# Altium PCB wifi_car.PcbDoc (part 5 of 5)
Units mm, origin at the board's own origin, x right, y up, seen from the top; angles counter-clockwise.
Board outline 68.55 x 80.89 mm, 2 copper layers (Top Layer, Bottom Layer); 133 components, 98 nets, 473 pads, 106 vias.
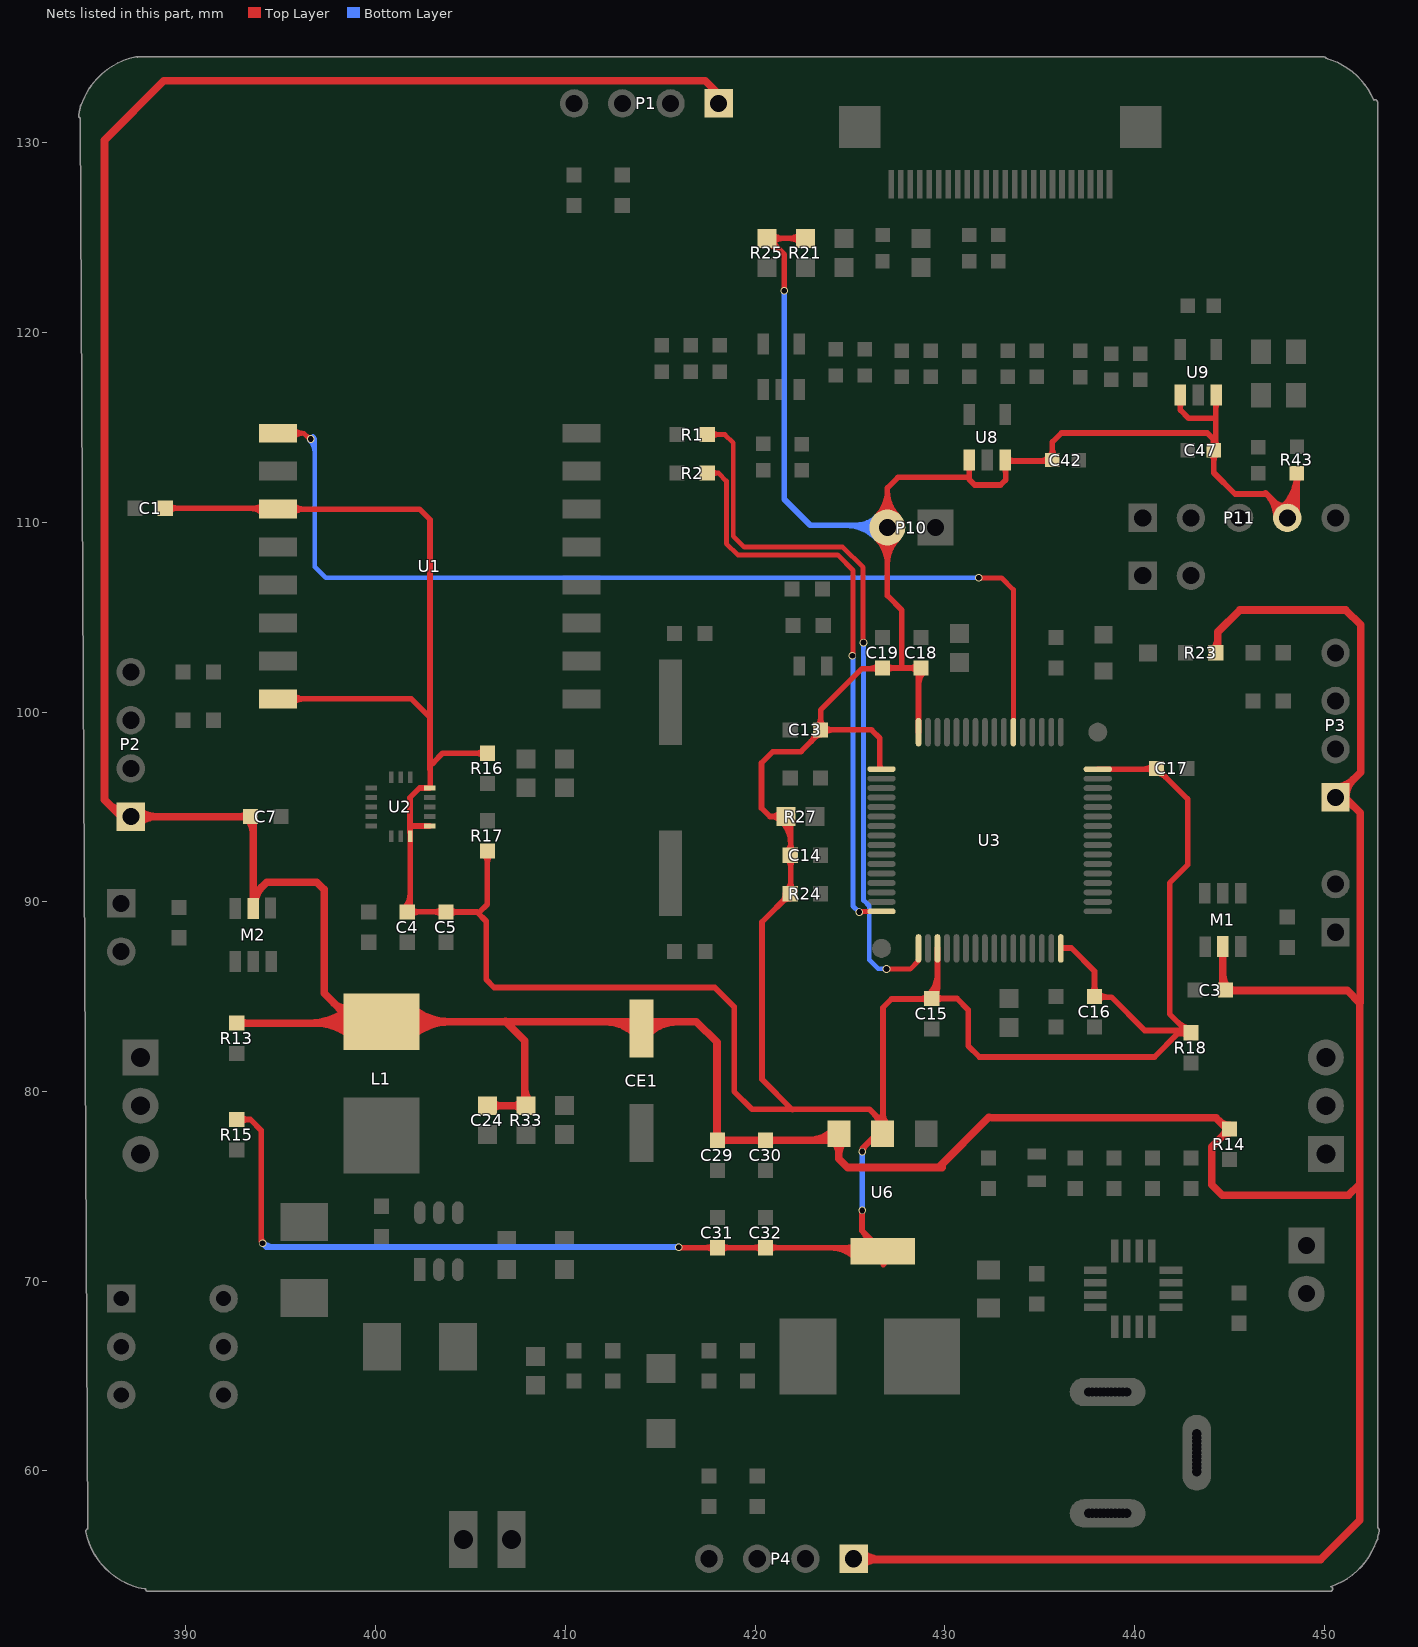
[diagram p5: the nets of this part, all layers, seen from the top]

## Via types
v1: diameter 0.4, hole 0.3, Top Layer to Bottom Layer, 101 vias
v2: diameter 5, hole 4.8, Top Layer to Bottom Layer, 4 vias
v3: diameter 0.6, hole 0.5, Top Layer to Bottom Layer, 1 vias

## Nets (pads, with @x,y where several pads share a name; then routed paths per layer and width w, separated by ;. In a path a pad name is that pad's centre, name@x,y a point inside that pad or via, vN(x,y) a via of type N, cw(c..) or ccw(c..) an arc to the next point about the centre after c; other vN are vias at no path point) (continued)
VCC3.3: C1.2 C4.2 C5.2 C13.2 C14.2 C15.2 C16.2 C17.2 C18.2 C19.2 C31.1 C32.1 C42.2 C47.2 P10.2 P11.4 R15.1 R16.2 R17.1 R18.1 R21.2 R24.2 R25.2 R27.1 R43.1 U1.3 U1.8 U2.1 U2.5 U2.16 U3.1 U3.19 U3.32 U3.48 U3.64 U6.2 U6.4 U8.1 U8.3 U9.1 U9.3 | length 554.8
  Top Layer w0.3: C1.2@388.912,110.744 U1.3@393.974,110.744 ; R15.1@392.684,78.524 393.397,78.524 393.972,77.949 v1@393.972,72.109 ; v1@393.971,72.09 v1@393.971,72.108 ; U1.8@394.844,100.696 401.884,100.696 402.863,99.716 ; U1.3@394.844,110.696 402.313,110.696 402.867,110.143 402.867,96.976 402.872,96.971 ; C4.2@401.671,89.467 C5.2@403.703,89.467 C5.2@403.749,89.467 ; C4.2@401.732,89.559 401.82,89.647 U2.16@401.82,93.446 ; U2.16@401.824,93.52 401.824,93.652 401.814,93.662 401.814,95.489 402.32,95.996 U2.5@402.845,95.996 ; 401.888,94.007 401.899,93.996 U2.1@402.845,93.996 ; U2.5@402.872,96.07 402.872,96.971 ; 402.88,96.963 402.872,96.971 ; 402.999,97.283 403.047,97.331 403.047,97.343 ; C5.2@403.974,89.46 405.342,89.46 405.83,88.972 405.83,85.902 406.247,85.486 417.877,85.486 418.897,84.465 418.897,80.004 419.838,79.063 426.033,79.063 U6.2@426.812,78.285 ; 405.482,89.46 405.892,89.87 R17.1@405.892,92.672 ; R16.2@405.892,97.828 403.531,97.828 403.047,97.343 ; v1@416.003,71.769 416.008,71.764 C31.1@418.014,71.764 C32.1@420.554,71.764 U6.4@425.772,71.764 ; R25.2@420.621,124.969 R25.2@420.687,124.969 ; R25.2@420.68,124.969 R25.2@420.687,124.969 ; v1@421.546,122.28 421.546,124.11 R25.2@420.687,124.969 ; R24.2@421.856,90.424 420.363,88.931 420.363,80.645 421.977,79.031 ; R24.2@421.886,90.54 421.886,94.425 421.952,94.491 420.783,94.491 420.338,94.937 420.338,97.313 420.939,97.914 422.417,97.914 C13.2@423.321,98.818 ; R21.2@422.653,124.969 R25.2@420.687,124.969 ; v1@425.633,73.733 425.633,72.663 U6.4@426.72,71.576 ; v1@425.646,76.856 425.646,76.983 426.439,77.776 U6.2@426.72,77.776 ; U3.1@426.574,97.086 426.574,98.627 426.141,99.06 C13.2@423.456,99.06 423.456,100.106 425.639,102.289 C19.2@426.648,102.289 ; C19.2@426.72,102.324 C18.2@428.435,102.324 ; U6.2@426.742,77.927 426.742,84.422 427.194,84.873 C15.2@429.175,84.873 ; 427.74,102.491 427.74,105.369 426.974,106.135 P10.2@426.974,109.728 426.974,111.807 427.538,112.372 431.249,112.372 ; U3.64@428.616,98.943 C18.2@428.616,102.359 ; C15.2@429.28,85.093 429.616,85.428 ; C15.2@429.447,84.899 C15.2@429.318,84.899 430.641,84.899 431.238,84.302 431.238,82.404 431.822,81.82 441.05,81.82 442.283,83.053 ; U3.19@429.616,87.543 429.616,85.428 ; U8.1@431.292,113.284 431.292,112.254 431.581,111.965 432.936,111.965 433.207,112.236 433.207,113.197 433.247,113.238 C42.2@435.442,113.238 ; C42.2@435.673,113.286 435.673,114.234 436.15,114.71 443.833,114.71 444.176,114.367 ; U3.32@436.111,87.537 436.134,87.561 436.673,87.561 437.894,86.339 437.894,85.325 C16.2@438.036,85.183 ; C16.2@437.969,84.974 438.036,84.974 438.783,84.974 440.539,83.218 R18.1@443.077,83.218 ; U3.48@438.066,96.993 C17.2@440.934,96.993 ; C17.2@441.16,97.028 441.189,97.028 442.8,95.416 442.8,91.944 441.851,90.995 441.851,84.091 R18.1@442.619,83.323 ; U9.1@442.418,116.71 442.418,115.924 442.854,115.488 444.123,115.488 ; R18.1@442.753,83.053 442.283,83.053 ; C47.2@444.176,113.984 444.176,114.367 ; C47.2@444.183,113.79 444.183,112.618 445.306,111.495 446.97,111.495 P11.4@447.994,110.47 ; U9.3@444.289,116.35 444.289,115.654 444.289,114.254 ; P11.4@448.191,110.257 448.564,110.63 R43.1@448.564,112.598 ; C1.2@389.089,110.567 cw(c389.516,110.14) 389.516,110.744 ; C1.2@389.089,110.567 cw(c389.516,110.14) 389.516,110.744 ; C1.2@389.089,110.567 cw(c389.516,110.14) 389.516,110.744 ; C1.2@389.089,110.921 ccw(c389.516,111.348) 389.516,110.744 ; C1.2@389.089,110.921 ccw(c389.516,111.348) 389.516,110.744 ; C1.2@389.089,110.921 ccw(c389.516,111.348) 389.516,110.744 ; R15.1@392.861,78.347 cw(c393.288,77.92) 393.288,78.524 ; R15.1@392.861,78.347 cw(c393.288,77.92) 393.288,78.524 ; R15.1@392.861,78.347 cw(c393.288,77.92) 393.288,78.524 ; R15.1@392.861,78.701 ccw(c393.288,79.128) 393.288,78.524 ; R15.1@392.861,78.701 ccw(c393.288,79.128) 393.288,78.524 ; R15.1@392.861,78.701 ccw(c393.288,79.128) 393.288,78.524 ; 393.383,110.744 cw(c393.383,109.735) U1.3@394.097,110.449 ; 393.383,110.744 cw(c393.383,109.735) U1.3@394.097,110.449 ; 393.383,110.744 cw(c393.383,109.735) U1.3@394.097,110.449 ; 393.615,110.744 ccw(c393.615,111.425) U1.3@394.097,110.943 ; 393.615,110.744 ccw(c393.615,111.425) U1.3@394.097,110.943 ; 393.615,110.744 ccw(c393.615,111.425) U1.3@394.097,110.943 ; 393.972,72.292 ccw(c394.334,72.292) v1@394.078,72.036 ; 393.972,72.292 ccw(c394.334,72.292) v1@394.078,72.036 ; 393.972,72.292 ccw(c394.334,72.292) v1@394.078,72.036 ; U1.8@395.592,100.449 cw(c396.189,99.851) 396.189,100.696 ; U1.8@395.592,100.449 cw(c396.189,99.851) 396.189,100.696 ; U1.8@395.592,100.449 cw(c396.189,99.851) 396.189,100.696 ; U1.8@395.592,100.944 ccw(c396.189,101.541) 396.189,100.696 ; U1.8@395.592,100.944 ccw(c396.189,101.541) 396.189,100.696 ; U1.8@395.592,100.944 ccw(c396.189,101.541) 396.189,100.696 ; U1.3@395.592,110.449 cw(c396.189,109.851) 396.189,110.696 ; U1.3@395.592,110.449 cw(c396.189,109.851) 396.189,110.696 ; U1.3@395.592,110.449 cw(c396.189,109.851) 396.189,110.696 ; U1.3@395.592,110.943 ccw(c396.189,111.541) 396.189,110.696 ; U1.3@395.592,110.943 ccw(c396.189,111.541) 396.189,110.696 ; U1.3@395.592,110.943 ccw(c396.189,111.541) 396.189,110.696 ; C4.2@401.495,89.644 ccw(c400.709,90.429) 401.82,90.429 ; C4.2@401.495,89.644 ccw(c400.709,90.429) 401.82,90.429 ; C4.2@401.495,89.644 ccw(c400.709,90.429) 401.82,90.429 ; C4.2@401.848,89.29 cw(c402.275,88.863) 402.275,89.467 ; C4.2@401.848,89.29 cw(c402.275,88.863) 402.275,89.467 ; C4.2@401.848,89.29 cw(c402.275,88.863) 402.275,89.467 ; C4.2@401.848,89.644 ccw(c402.275,90.07) 402.275,89.467 ; C4.2@401.848,89.644 ccw(c402.275,90.07) 402.275,89.467 ; C4.2@401.848,89.644 ccw(c402.275,90.07) 402.275,89.467 ; 402.872,96.971 402.872,97.169 403.047,97.343 ; 403.1,89.467 ccw(c403.1,90.07) C5.2@403.527,89.644 ; 403.1,89.467 cw(c403.1,88.863) C5.2@403.527,89.29 ; 403.1,89.467 ccw(c403.1,90.07) C5.2@403.527,89.644 ; 403.1,89.467 cw(c403.1,88.863) C5.2@403.527,89.29 ; 403.1,89.467 ccw(c403.1,90.07) C5.2@403.527,89.644 ; 403.1,89.467 cw(c403.1,88.863) C5.2@403.527,89.29 ; C5.2@403.88,89.29 cw(c404.291,88.879) 404.291,89.46 ; C5.2@403.88,89.29 cw(c404.291,88.879) 404.291,89.46 ; C5.2@403.88,89.29 cw(c404.291,88.879) 404.291,89.46 ; C5.2@403.88,89.644 ccw(c404.323,90.087) 404.323,89.46 ; C5.2@403.88,89.644 ccw(c404.323,90.087) 404.323,89.46 ; C5.2@403.88,89.644 ccw(c404.323,90.087) 404.323,89.46 ; 405.288,97.828 ccw(c405.288,98.432) R16.2@405.715,98.005 ; 405.288,97.828 cw(c405.288,97.224) R16.2@405.715,97.651 ; 405.288,97.828 ccw(c405.288,98.432) R16.2@405.715,98.005 ; 405.288,97.828 cw(c405.288,97.224) R16.2@405.715,97.651 ; 405.288,97.828 ccw(c405.288,98.432) R16.2@405.715,98.005 ; 405.288,97.828 cw(c405.288,97.224) R16.2@405.715,97.651 ; R17.1@405.715,92.495 cw(c405.288,92.068) 405.892,92.068 ; R17.1@405.715,92.495 cw(c405.288,92.068) 405.892,92.068 ; R17.1@405.715,92.495 cw(c405.288,92.068) 405.892,92.068 ; 405.892,92.068 cw(c406.496,92.068) R17.1@406.069,92.495 ; 405.892,92.068 cw(c406.496,92.068) R17.1@406.069,92.495 ; 405.892,92.068 cw(c406.496,92.068) R17.1@406.069,92.495 ; 417.41,71.764 ccw(c417.41,72.368) C31.1@417.837,71.941 ; 417.41,71.764 cw(c417.41,71.161) C31.1@417.837,71.587 ; 417.41,71.764 ccw(c417.41,72.368) C31.1@417.837,71.941 ; 417.41,71.764 cw(c417.41,71.161) C31.1@417.837,71.587 ; 417.41,71.764 ccw(c417.41,72.368) C31.1@417.837,71.941 ; 417.41,71.764 cw(c417.41,71.161) C31.1@417.837,71.587 ; C31.1@418.191,71.587 cw(c418.617,71.161) 418.617,71.764 ; C31.1@418.191,71.587 cw(c418.617,71.161) 418.617,71.764 ; C31.1@418.191,71.587 cw(c418.617,71.161) 418.617,71.764 ; C31.1@418.191,71.941 ccw(c418.617,72.368) 418.617,71.764 ; C31.1@418.191,71.941 ccw(c418.617,72.368) 418.617,71.764 ; C31.1@418.191,71.941 ccw(c418.617,72.368) 418.617,71.764 ; 419.95,71.764 ccw(c419.95,72.368) C32.1@420.377,71.941 ; 419.95,71.764 cw(c419.95,71.161) C32.1@420.377,71.587 ; 419.95,71.764 ccw(c419.95,72.368) C32.1@420.377,71.941 ; 419.95,71.764 cw(c419.95,71.161) C32.1@420.377,71.587 ; 419.95,71.764 ccw(c419.95,72.368) C32.1@420.377,71.941 ; 419.95,71.764 cw(c419.95,71.161) C32.1@420.377,71.587 ; R25.2@420.621,124.619 cw(c420.621,123.614) 421.332,124.325 ; R25.2@420.621,124.619 cw(c420.621,123.614) 421.332,124.325 ; R25.2@420.621,124.619 cw(c420.621,123.614) 421.332,124.325 ; C32.1@420.731,71.587 cw(c421.157,71.161) 421.157,71.764 ; C32.1@420.731,71.587 cw(c421.157,71.161) 421.157,71.764 ; C32.1@420.731,71.587 cw(c421.157,71.161) 421.157,71.764 ; C32.1@420.731,71.941 ccw(c421.157,72.368) 421.157,71.764 ; C32.1@420.731,71.941 ccw(c421.157,72.368) 421.157,71.764 ; C32.1@420.731,71.941 ccw(c421.157,72.368) 421.157,71.764 ; 420.795,94.491 ccw(c420.795,95.336) R27.1@421.393,94.739 ; 420.795,94.491 cw(c420.795,93.646) R27.1@421.393,94.244 ; 420.795,94.491 ccw(c420.795,95.336) R27.1@421.393,94.739 ; 420.795,94.491 cw(c420.795,93.646) R27.1@421.393,94.244 ; 420.795,94.491 ccw(c420.795,95.336) R27.1@421.393,94.739 ; 420.795,94.491 cw(c420.795,93.646) R27.1@421.393,94.244 ; R25.2@420.868,124.722 cw(c421.466,124.124) 421.466,124.969 ; R25.2@420.868,124.722 cw(c421.466,124.124) 421.466,124.969 ; R25.2@420.868,124.722 cw(c421.466,124.124) 421.466,124.969 ; R25.2@420.868,125.217 ccw(c421.466,125.814) 421.466,124.969 ; R25.2@420.868,125.217 ccw(c421.466,125.814) 421.466,124.969 ; R25.2@420.868,125.217 ccw(c421.466,125.814) 421.466,124.969 ; R25.2@420.971,124.969 ccw(c421.655,124.969) 421.171,124.486 ; R25.2@420.971,124.969 ccw(c421.655,124.969) 421.171,124.486 ; R25.2@420.971,124.969 ccw(c421.655,124.969) 421.171,124.486 ; R27.1@421.393,94.244 cw(c420.203,93.054) 421.886,93.054 ; R27.1@421.393,94.244 cw(c420.203,93.054) 421.886,93.054 ; R27.1@421.393,94.244 cw(c420.203,93.054) 421.886,93.054 ; 421.429,89.997 ccw(c421.002,90.424) R24.2@421.606,90.424 ; 421.429,89.997 cw(c421.856,89.57) R24.2@421.856,90.174 ; 421.429,89.997 ccw(c421.002,90.424) R24.2@421.606,90.424 ; 421.429,89.997 cw(c421.856,89.57) R24.2@421.856,90.174 ; 421.429,89.997 ccw(c421.002,90.424) R24.2@421.606,90.424 ; 421.429,89.997 cw(c421.856,89.57) R24.2@421.856,90.174 ; R27.1@421.605,94.456 cw(c420.927,93.778) 421.886,93.778 ; R27.1@421.605,94.456 cw(c420.927,93.778) 421.886,93.778 ; R27.1@421.605,94.456 cw(c420.927,93.778) 421.886,93.778 ; R24.2@421.679,90.601 ccw(c421.18,91.1) 421.886,91.1 ; R24.2@421.679,90.601 ccw(c421.18,91.1) 421.886,91.1 ; R24.2@421.679,90.601 ccw(c421.18,91.1) 421.886,91.1 ; C14.2@421.679,92.279 cw(c421.18,91.78) 421.886,91.78 ; C14.2@421.679,92.279 cw(c421.18,91.78) 421.886,91.78 ; C14.2@421.679,92.279 cw(c421.18,91.78) 421.886,91.78 ; C14.2@421.679,92.633 ccw(c421.18,93.132) 421.886,93.132 ; C14.2@421.679,92.633 ccw(c421.18,93.132) 421.886,93.132 ; C14.2@421.679,92.633 ccw(c421.18,93.132) 421.886,93.132 ; 421.808,124.969 ccw(c421.808,125.814) R21.2@422.405,125.217 ; 421.808,124.969 cw(c421.808,124.124) R21.2@422.405,124.722 ; 421.808,124.969 ccw(c421.808,125.814) R21.2@422.405,125.217 ; 421.808,124.969 cw(c421.808,124.124) R21.2@422.405,124.722 ; 421.808,124.969 ccw(c421.808,125.814) R21.2@422.405,125.217 ; 421.808,124.969 cw(c421.808,124.124) R21.2@422.405,124.722 ; 421.886,90.955 ccw(c422.387,90.955) R24.2@422.033,90.601 ; 421.886,90.955 ccw(c422.387,90.955) R24.2@422.033,90.601 ; 421.886,90.955 ccw(c422.387,90.955) R24.2@422.033,90.601 ; 421.886,91.925 cw(c422.387,91.925) C14.2@422.033,92.279 ; 421.886,91.925 cw(c422.387,91.925) C14.2@422.033,92.279 ; 421.886,91.925 cw(c422.387,91.925) C14.2@422.033,92.279 ; 421.886,92.987 ccw(c422.387,92.987) C14.2@422.033,92.633 ; 421.886,92.987 ccw(c422.387,92.987) C14.2@422.033,92.633 ; 421.886,92.987 ccw(c422.387,92.987) C14.2@422.033,92.633 ; 422.953,98.45 ccw(c422.343,99.06) C13.2@423.206,99.06 ; 422.953,98.45 ccw(c422.343,99.06) C13.2@423.206,99.06 ; 422.953,98.45 ccw(c422.343,99.06) C13.2@423.206,99.06 ; C13.2@423.213,98.709 cw(c423.456,98.466) C13.2@423.456,98.81 ; C13.2@423.213,98.709 cw(c423.456,98.466) C13.2@423.456,98.81 ; C13.2@423.213,98.709 cw(c423.456,98.466) C13.2@423.456,98.81 ; C13.2@423.279,99.237 ccw(c422.852,99.664) 423.456,99.664 ; C13.2@423.279,99.237 ccw(c422.852,99.664) 423.456,99.664 ; C13.2@423.279,99.237 ccw(c422.852,99.664) 423.456,99.664 ; 423.456,99.664 ccw(c424.059,99.664) C13.2@423.633,99.237 ; 423.456,99.664 ccw(c424.059,99.664) C13.2@423.633,99.237 ; 423.456,99.664 ccw(c424.059,99.664) C13.2@423.633,99.237 ; C13.2@423.633,98.883 cw(c424.059,98.456) 424.059,99.06 ; C13.2@423.633,98.883 cw(c424.059,98.456) 424.059,99.06 ; C13.2@423.633,98.883 cw(c424.059,98.456) 424.059,99.06 ; C13.2@423.633,99.237 ccw(c424.059,99.664) 424.059,99.06 ; C13.2@423.633,99.237 ccw(c424.059,99.664) 424.059,99.06 ; C13.2@423.633,99.237 ccw(c424.059,99.664) 424.059,99.06 ; 423.938,71.764 cw(c423.938,69.794) U6.4@425.331,71.187 ; 423.938,71.764 cw(c423.938,69.794) U6.4@425.331,71.187 ; 423.938,71.764 cw(c423.938,69.794) U6.4@425.331,71.187 ; 424.662,71.764 cw(c424.662,70.518) U6.4@425.543,71.399 ; 424.662,71.764 cw(c424.662,70.518) U6.4@425.543,71.399 ; 424.662,71.764 cw(c424.662,70.518) U6.4@425.543,71.399 ; 424.846,71.764 ccw(c424.846,72.45) U6.4@425.331,71.965 ; 424.846,71.764 ccw(c424.846,72.45) U6.4@425.331,71.965 ; 424.846,71.764 ccw(c424.846,72.45) U6.4@425.331,71.965 ; 425.652,72.644 cw(c425.037,72.029) U6.4@425.762,71.548 ; 425.652,72.644 cw(c425.037,72.029) U6.4@425.762,71.548 ; 425.652,72.644 cw(c425.037,72.029) U6.4@425.762,71.548 ; v1@425.702,76.832 cw(c426.203,76.832) 425.849,77.186 ; v1@425.702,76.832 cw(c426.203,76.832) 425.849,77.186 ; v1@425.702,76.832 cw(c426.203,76.832) 425.849,77.186 ; 425.903,77.241 cw(c426.606,76.538) U6.2@426.705,77.527 ; 425.903,77.241 cw(c426.606,76.538) U6.2@426.705,77.527 ; 425.903,77.241 cw(c426.606,76.538) U6.2@426.705,77.527 ; 425.911,72.385 cw(c425.349,71.822) U6.4@426.012,71.383 ; 425.911,72.385 cw(c425.349,71.822) U6.4@426.012,71.383 ; 425.911,72.385 cw(c425.349,71.822) U6.4@426.012,71.383 ; 426.033,102.289 ccw(c426.033,103.011) C19.2@426.543,102.501 ; 426.033,102.289 ccw(c426.033,103.011) C19.2@426.543,102.501 ; 426.033,102.289 ccw(c426.033,103.011) C19.2@426.543,102.501 ; U6.4@426.171,72.125 cw(c425.661,71.615) U6.4@426.262,71.217 ; U6.4@426.171,72.125 cw(c425.661,71.615) U6.4@426.262,71.217 ; U6.4@426.171,72.125 cw(c425.661,71.615) U6.4@426.262,71.217 ; 426.2,102.289 cw(c426.2,101.804) C19.2@426.543,102.147 ; 426.2,102.289 cw(c426.2,101.804) C19.2@426.543,102.147 ; 426.2,102.289 cw(c426.2,101.804) C19.2@426.543,102.147 ; 426.226,78.87 cw(c425.377,78.021) U6.2@426.571,77.892 ; 426.226,78.87 cw(c425.377,78.021) U6.2@426.571,77.892 ; 426.226,78.87 cw(c425.377,78.021) U6.2@426.571,77.892 ; U6.2@426.402,78.194 ccw(c425.582,79.015) 426.742,79.015 ; U6.2@426.402,78.194 ccw(c425.582,79.015) 426.742,79.015 ; U6.2@426.402,78.194 ccw(c425.582,79.015) 426.742,79.015 ; P10.2@426.408,109.162 cw(c425.043,107.797) 426.974,107.797 ; P10.2@426.408,109.162 cw(c425.043,107.797) 426.974,107.797 ; P10.2@426.408,109.162 cw(c425.043,107.797) 426.974,107.797 ; P10.2@426.408,110.294 ccw(c425.043,111.659) 426.974,111.659 ; P10.2@426.408,110.294 ccw(c425.043,111.659) 426.974,111.659 ; P10.2@426.408,110.294 ccw(c425.043,111.659) 426.974,111.659 ; U6.4@426.43,71.866 cw(c425.973,71.409) U6.4@426.512,71.051 ; U6.4@426.43,71.866 cw(c425.973,71.409) U6.4@426.512,71.051 ; U6.4@426.43,71.866 cw(c425.973,71.409) U6.4@426.512,71.051 ; 426.574,97.214 ccw(c426.887,97.214) U3.1@426.666,96.993 ; 426.574,97.214 ccw(c426.887,97.214) U3.1@426.666,96.993 ; 426.574,97.214 ccw(c426.887,97.214) U3.1@426.666,96.993 ; P10.2@426.62,109.374 cw(c425.767,108.521) 426.974,108.521 ; P10.2@426.62,109.374 cw(c425.767,108.521) 426.974,108.521 ; P10.2@426.62,109.374 cw(c425.767,108.521) 426.974,108.521 ; P10.2@426.62,110.082 ccw(c425.767,110.935) 426.974,110.935 ; P10.2@426.62,110.082 ccw(c425.767,110.935) 426.974,110.935 ; P10.2@426.62,110.082 ccw(c425.767,110.935) 426.974,110.935 ; U6.4@426.689,71.607 cw(c426.284,71.202) U6.4@426.762,70.885 ; U6.4@426.689,71.607 cw(c426.284,71.202) U6.4@426.762,70.885 ; U6.4@426.689,71.607 cw(c426.284,71.202) U6.4@426.762,70.885 ; 426.742,78.91 ccw(c427.754,78.91) U6.2@427.038,78.194 ; 426.742,78.91 ccw(c427.754,78.91) U6.2@427.038,78.194 ; 426.742,78.91 ccw(c427.754,78.91) U6.2@427.038,78.194 ; C19.2@426.897,102.147 cw(c427.324,101.72) 427.324,102.324 ; C19.2@426.897,102.147 cw(c427.324,101.72) 427.324,102.324 ; C19.2@426.897,102.147 cw(c427.324,101.72) 427.324,102.324 ; C19.2@426.897,102.501 ccw(c427.324,102.928) 427.324,102.324 ; C19.2@426.897,102.501 ccw(c427.324,102.928) 427.324,102.324 ; C19.2@426.897,102.501 ccw(c427.324,102.928) 427.324,102.324 ; 426.974,107.797 cw(c428.905,107.797) P10.2@427.54,109.162 ; 426.974,107.797 cw(c428.905,107.797) P10.2@427.54,109.162 ; 426.974,107.797 cw(c428.905,107.797) P10.2@427.54,109.162 ; 426.974,108.521 cw(c428.181,108.521) P10.2@427.328,109.374 ; 426.974,108.521 cw(c428.181,108.521) P10.2@427.328,109.374 ; 426.974,108.521 cw(c428.181,108.521) P10.2@427.328,109.374 ; 426.974,110.935 ccw(c428.181,110.935) P10.2@427.328,110.082 ; 426.974,110.935 ccw(c428.181,110.935) P10.2@427.328,110.082 ; 426.974,110.935 ccw(c428.181,110.935) P10.2@427.328,110.082 ; 426.974,111.659 ccw(c428.905,111.659) P10.2@427.54,110.294 ; 426.974,111.659 ccw(c428.905,111.659) P10.2@427.54,110.294 ; 426.974,111.659 ccw(c428.905,111.659) P10.2@427.54,110.294 ; 428.148,102.324 ccw(c428.148,102.928) C18.2@428.575,102.501 ; 428.148,102.324 cw(c428.148,101.72) C18.2@428.575,102.147 ; 428.148,102.324 ccw(c428.148,102.928) C18.2@428.575,102.501 ; 428.148,102.324 cw(c428.148,101.72) C18.2@428.575,102.147 ; 428.148,102.324 ccw(c428.148,102.928) C18.2@428.575,102.501 ; 428.148,102.324 cw(c428.148,101.72) C18.2@428.575,102.147 ; 428.616,101.392 cw(c429.684,101.392) C18.2@428.929,102.147 ; 428.616,101.392 cw(c429.684,101.392) C18.2@428.929,102.147 ; 428.616,101.392 cw(c429.684,101.392) C18.2@428.929,102.147 ; 428.654,84.873 ccw(c428.654,85.563) C15.2@429.141,85.075 ; 428.654,84.873 ccw(c428.654,85.563) C15.2@429.141,85.075 ; 428.654,84.873 ccw(c428.654,85.563) C15.2@429.141,85.075 ; 428.775,84.873 cw(c428.775,84.356) C15.2@429.141,84.722 ; 428.775,84.873 cw(c428.775,84.356) C15.2@429.141,84.722 ; 428.775,84.873 cw(c428.775,84.356) C15.2@429.141,84.722 ; C15.2@429.141,85.075 ccw(c427.995,86.222) 429.616,86.222 ; C15.2@429.141,85.075 ccw(c427.995,86.222) 429.616,86.222 ; C15.2@429.141,85.075 ccw(c427.995,86.222) 429.616,86.222 ; C15.2@429.353,84.863 ccw(c428.719,85.497) 429.616,85.497 ; C15.2@429.353,84.863 ccw(c428.719,85.497) 429.616,85.497 ; C15.2@429.353,84.863 ccw(c428.719,85.497) 429.616,85.497 ; C15.2@429.495,84.722 cw(c429.921,84.295) 429.921,84.899 ; C15.2@429.495,84.722 cw(c429.921,84.295) 429.921,84.899 ; C15.2@429.495,84.722 cw(c429.921,84.295) 429.921,84.899 ; C15.2@429.495,85.075 ccw(c429.921,85.502) 429.921,84.899 ; C15.2@429.495,85.075 ccw(c429.921,85.502) 429.921,84.899 ; C15.2@429.495,85.075 ccw(c429.921,85.502) 429.921,84.899 ; C15.2@429.543,85.006 cw(c429.878,85.166) 429.616,85.428 ; C15.2@429.543,85.006 cw(c429.878,85.166) 429.616,85.428 ; C15.2@429.543,85.006 cw(c429.878,85.166) 429.616,85.428 ; U8.1@431.186,112.928 cw(c430.93,112.672) 431.292,112.672 ; U8.1@431.186,112.928 cw(c430.93,112.672) 431.292,112.672 ; U8.1@431.186,112.928 cw(c430.93,112.672) 431.292,112.672 ; 431.292,112.672 cw(c431.654,112.672) U8.1@431.398,112.928 ; 431.292,112.672 cw(c431.654,112.672) U8.1@431.398,112.928 ; 431.292,112.672 cw(c431.654,112.672) U8.1@431.398,112.928 ; U8.3@433.086,112.928 cw(c432.794,112.636) 433.207,112.636 ; U8.3@433.086,112.928 cw(c432.794,112.636) 433.207,112.636 ; U8.3@433.086,112.928 cw(c432.794,112.636) 433.207,112.636 ; 433.207,112.707 cw(c433.519,112.707) U8.3@433.298,112.928 ; 433.207,112.707 cw(c433.519,112.707) U8.3@433.298,112.928 ; 433.207,112.707 cw(c433.519,112.707) U8.3@433.298,112.928 ; U8.3@433.298,113.39 ccw(c433.665,113.757) 433.665,113.238 ; U8.3@433.298,113.39 ccw(c433.665,113.757) 433.665,113.238 ; U8.3@433.298,113.39 ccw(c433.665,113.757) 433.665,113.238 ; 435.001,113.238 ccw(c435.001,113.958) C42.2@435.51,113.449 ; 435.001,113.238 ccw(c435.001,113.958) C42.2@435.51,113.449 ; 435.001,113.238 ccw(c435.001,113.958) C42.2@435.51,113.449 ; 435.231,113.238 cw(c435.231,112.843) C42.2@435.51,113.122 ; 435.231,113.238 cw(c435.231,112.843) C42.2@435.51,113.122 ; 435.231,113.238 cw(c435.231,112.843) C42.2@435.51,113.122 ; C42.2@435.51,113.449 ccw(c435.116,113.843) 435.673,113.843 ; C42.2@435.51,113.449 ccw(c435.116,113.843) 435.673,113.843 ; C42.2@435.51,113.449 ccw(c435.116,113.843) 435.673,113.843 ; 435.673,113.843 ccw(c436.231,113.843) C42.2@435.837,113.449 ; 435.673,113.843 ccw(c436.231,113.843) C42.2@435.837,113.449 ; 435.673,113.843 ccw(c436.231,113.843) C42.2@435.837,113.449 ; C16.2@437.719,85.175 ccw(c437.297,85.598) 437.894,85.598 ; C16.2@437.719,85.175 ccw(c437.297,85.598) 437.894,85.598 ; C16.2@437.719,85.175 ccw(c437.297,85.598) 437.894,85.598 ; 437.894,85.607 ccw(c438.504,85.607) C16.2@438.073,85.175 ; 437.894,85.607 ccw(c438.504,85.607) C16.2@438.073,85.175 ; 437.894,85.607 ccw(c438.504,85.607) C16.2@438.073,85.175 ; C16.2@438.073,84.822 cw(c438.441,84.454) 438.44,84.974 ; C16.2@438.073,84.822 cw(c438.441,84.454) 438.44,84.974 ; C16.2@438.073,84.822 cw(c438.441,84.454) 438.44,84.974 ; C16.2@438.073,85.175 ccw(c438.559,85.661) 438.559,84.974 ; C16.2@438.073,85.175 ccw(c438.559,85.661) 438.559,84.974 ; C16.2@438.073,85.175 ccw(c438.559,85.661) 438.559,84.974 ; 440.471,96.993 ccw(c440.471,97.717) C17.2@440.983,97.205 ; 440.471,96.993 ccw(c440.471,97.717) C17.2@440.983,97.205 ; 440.471,96.993 ccw(c440.471,97.717) C17.2@440.983,97.205 ; 440.642,96.993 cw(c440.642,96.51) C17.2@440.983,96.851 ; 440.642,96.993 cw(c440.642,96.51) C17.2@440.983,96.851 ; 440.642,96.993 cw(c440.642,96.51) C17.2@440.983,96.851 ; C17.2@441.16,96.778 cw(c441.16,96.105) 441.636,96.581 ; C17.2@441.16,96.778 cw(c441.16,96.105) 441.636,96.581 ; C17.2@441.16,96.778 cw(c441.16,96.105) 441.636,96.581 ; C17.2@441.41,97.028 ccw(c441.944,97.028) 441.566,96.65 ; C17.2@441.41,97.028 ccw(c441.944,97.028) 441.566,96.65 ; C17.2@441.41,97.028 ccw(c441.944,97.028) 441.566,96.65 ; 442.079,83.218 cw(c442.079,82.199) R18.1@442.799,82.919 ; 442.079,83.218 cw(c442.079,82.199) R18.1@442.799,82.919 ; 442.079,83.218 cw(c442.079,82.199) R18.1@442.799,82.919 ; 442.283,83.053 ccw(c442.283,83.768) R18.1@442.797,83.27 ; 442.283,83.053 ccw(c442.283,83.768) R18.1@442.797,83.27 ; 442.283,83.053 ccw(c442.283,83.768) R18.1@442.797,83.27 ; U9.1@442.312,116.354 cw(c442.056,116.098) 442.418,116.098 ; U9.1@442.312,116.354 cw(c442.056,116.098) 442.418,116.098 ; U9.1@442.312,116.354 cw(c442.056,116.098) 442.418,116.098 ; 442.327,83.615 ccw(c442.976,84.263) R18.1@442.976,83.346 ; 442.327,83.615 ccw(c442.976,84.263) R18.1@442.976,83.346 ; 442.327,83.615 ccw(c442.976,84.263) R18.1@442.976,83.346 ; 442.418,116.098 cw(c442.78,116.098) U9.1@442.524,116.354 ; 442.418,116.098 cw(c442.78,116.098) U9.1@442.524,116.354 ; 442.418,116.098 cw(c442.78,116.098) U9.1@442.524,116.354 ; 442.477,83.053 cw(c442.477,82.597) R18.1@442.799,82.919 ; 442.477,83.053 cw(c442.477,82.597) R18.1@442.799,82.919 ; 442.477,83.053 cw(c442.477,82.597) R18.1@442.799,82.919 ; C47.2@444.019,113.627 cw(c443.625,113.233) 444.183,113.233 ; C47.2@444.019,113.627 cw(c443.625,113.233) 444.183,113.233 ; C47.2@444.019,113.627 cw(c443.625,113.233) 444.183,113.233 ; C47.2@444.019,113.954 ccw(c443.367,114.606) 444.289,114.606 ; C47.2@444.019,113.954 ccw(c443.641,114.332) 444.176,114.332 ; C47.2@444.019,113.954 ccw(c443.367,114.606) 444.289,114.606 ; C47.2@444.019,113.954 ccw(c443.641,114.332) 444.176,114.332 ; C47.2@444.019,113.954 ccw(c443.367,114.606) 444.289,114.606 ; C47.2@444.019,113.954 ccw(c443.641,114.332) 444.176,114.332 ; C47.2@444.112,114.01 ccw(c444.034,114.254) 444.289,114.254 ; C47.2@444.112,114.01 ccw(c444.034,114.254) 444.289,114.254 ; C47.2@444.112,114.01 ccw(c444.034,114.254) 444.289,114.254 ; 444.164,114.379 cw(c443.801,114.017) C47.2@444.242,113.755 ; 444.164,114.379 cw(c443.801,114.017) C47.2@444.242,113.755 ; 444.164,114.379 cw(c443.801,114.017) C47.2@444.242,113.755 ; 444.176,114.364 ccw(c444.756,114.364) C47.2@444.346,113.954 ; 444.176,114.364 ccw(c444.756,114.364) C47.2@444.346,113.954 ; 444.176,114.364 ccw(c444.756,114.364) C47.2@444.346,113.954 ; 444.176,114.367 444.289,114.254 ; 444.183,113.233 cw(c444.74,113.233) C47.2@444.346,113.627 ; 444.183,113.233 cw(c444.74,113.233) C47.2@444.346,113.627 ; 444.183,113.233 cw(c444.74,113.233) C47.2@444.346,113.627 ; 444.289,116.029 cw(c444.749,116.029) U9.3@444.424,116.354 ; 444.289,116.029 cw(c444.749,116.029) U9.3@444.424,116.354 ; 444.289,116.029 cw(c444.749,116.029) U9.3@444.424,116.354 ; 446.91,111.554 cw(c445.592,110.236) P11.4@447.456,110.236 ; 446.91,111.554 cw(c445.592,110.236) P11.4@447.456,110.236 ; 446.91,111.554 cw(c445.592,110.236) P11.4@447.456,110.236 ; 447.326,111.138 ccw(c448.056,111.869) P11.4@448.056,110.836 ; 447.326,111.138 ccw(c448.056,111.869) P11.4@448.056,110.836 ; 447.326,111.138 ccw(c448.056,111.869) P11.4@448.056,110.836 ; 447.422,111.042 cw(c446.616,110.236) P11.4@447.756,110.236 ; 447.422,111.042 cw(c446.616,110.236) P11.4@447.756,110.236 ; 447.422,111.042 cw(c446.616,110.236) P11.4@447.756,110.236 ; P11.4@447.672,110.697 ccw(c446.092,112.598) R43.1@448.564,112.598 ; P11.4@447.672,110.697 ccw(c446.092,112.598) R43.1@448.564,112.598 ; P11.4@447.672,110.697 ccw(c446.092,112.598) R43.1@448.564,112.598 ; P11.4@447.864,110.467 ccw(c446.624,111.959) 448.564,111.959 ; P11.4@447.864,110.467 ccw(c446.624,111.959) 448.564,111.959 ; P11.4@447.864,110.467 ccw(c446.624,111.959) 448.564,111.959 ; P11.4@448.056,110.236 ccw(c447.156,111.319) 448.564,111.319 ; P11.4@448.056,110.236 ccw(c447.156,111.319) 448.564,111.319 ; P11.4@448.056,110.236 ccw(c447.156,111.319) 448.564,111.319 ; R43.1@448.401,112.435 cw(c448.006,112.041) 448.564,112.041 ; R43.1@448.401,112.435 cw(c448.006,112.041) 448.564,112.041 ; R43.1@448.401,112.435 cw(c448.006,112.041) 448.564,112.041 ; 448.564,112.041 cw(c449.122,112.041) R43.1@448.727,112.435 ; 448.564,112.041 cw(c449.122,112.041) R43.1@448.727,112.435 ; 448.564,112.041 cw(c449.122,112.041) R43.1@448.727,112.435
  Bottom Layer w0.3: v1(394.042,72.001) 394.239,71.805 415.914,71.805 v1@415.949,71.84 ; v1(421.536,122.2) 421.536,111.217 422.909,109.844 P10.2@426.104,109.844 ; v1@425.652,73.74 v1(425.652,76.832) ; v1@394.078,72.036 ccw(c394.637,72.595) 394.637,71.805 ; v1@394.078,72.036 ccw(c394.637,72.595) 394.637,71.805 ; v1@394.078,72.036 ccw(c394.637,72.595) 394.637,71.805 ; 424.761,109.844 cw(c424.761,107.515) P10.2@426.408,109.162 ; 424.761,109.844 cw(c424.761,107.515) P10.2@426.408,109.162 ; 424.761,109.844 cw(c424.761,107.515) P10.2@426.408,109.162 ; 425.324,109.844 ccw(c425.324,111.378) P10.2@426.408,110.294 ; 425.324,109.844 ccw(c425.324,111.378) P10.2@426.408,110.294 ; 425.324,109.844 ccw(c425.324,111.378) P10.2@426.408,110.294 ; 425.486,109.844 cw(c425.486,108.24) P10.2@426.62,109.374 ; 425.486,109.844 cw(c425.486,108.24) P10.2@426.62,109.374 ; 425.486,109.844 cw(c425.486,108.24) P10.2@426.62,109.374
  other v1: 415.985,71.787 425.643,73.73
VCC5: C3.1 C7.1 C24.1 C29.1 C30.1 CE1.1 L1.2 M1.5 M2.5 P1.1 P2.1 P3.1 P4.1 R13.2 R14.2 R23.1 R33.1 U6.3 | length 422.3
  Top Layer w0.4: R13.2@392.684,83.604 L1.2@398.893,83.604 ; C7.1@393.328,94.578 393.238,94.488 386.588,94.488 385.709,95.367 385.709,130.147 388.844,133.282 417.369,133.282 418.214,132.438 P1.1@418.342,132.438 ; M2.5@393.544,89.643 393.544,90.322 ; 393.544,91.136 393.544,90.322 ; 393.545,91.137 393.545,94.415 C7.1@393.565,94.436 ; L1.2@398.749,83.705 397.284,85.17 397.284,90.645 396.889,91.039 394.261,91.039 393.544,90.322 ; L1.2@400.304,83.675 407.328,83.675 407.329,83.677 413.324,83.677 CE1.1@413.976,83.025 ; C24.1@405.895,79.248 407.817,79.248 407.871,79.301 407.871,82.67 406.844,83.697 ; CE1.1@414.02,83.312 414.386,83.678 416.903,83.678 417.997,82.585 C29.1@417.997,77.478 ; C29.1@417.84,77.428 C29.1@418.014,77.428 419.528,77.428 ; 419.538,77.428 C30.1@420.554,77.428 U6.3@424.503,77.428 ; U6.3@424.42,77.776 424.42,76.45 424.879,75.991 429.856,75.991 ; P4.1@425.32,55.333 449.819,55.333 451.878,57.392 451.878,75.12 ; 429.714,76.02 432.33,78.635 ; 432.471,78.607 444.295,78.607 R14.2@444.767,78.135 ; R23.1@444.392,103.435 444.392,104.22 445.55,105.378 451.143,105.378 451.927,104.593 451.927,96.835 P3.1@450.596,95.504 ; M1.5@444.656,87.649 444.656,85.609 C3.1@444.81,85.456 ; C3.1@444.783,85.325 451.213,85.325 451.878,84.66 ; R14.2@445.008,78.016 444.077,77.085 444.077,75.079 444.634,74.522 451.28,74.522 451.878,75.12 ; P3.1@451.19,95.395 451.894,94.691 451.894,84.676 451.878,84.66 ; 385.963,95.113 ccw(c386.496,95.646) P2.1@386.843,94.976 ; 385.963,95.113 ccw(c386.496,95.646) P2.1@386.843,94.976 ; 385.963,95.113 ccw(c386.496,95.646) P2.1@386.843,94.976 ; P2.1@386.35,94.726 ccw(c386.76,95.137) P2.1@387.027,94.621 ; P2.1@386.35,94.726 ccw(c386.76,95.137) P2.1@387.027,94.621 ; P2.1@386.35,94.726 ccw(c386.76,95.137) P2.1@387.027,94.621 ; P2.1@387.485,94.099 cw(c388.424,93.16) 388.424,94.488 ; P2.1@387.485,94.099 cw(c388.424,93.16) 388.424,94.488 ; P2.1@387.485,94.099 cw(c388.424,93.16) 388.424,94.488 ; P2.1@387.485,94.877 ccw(c388.424,95.816) 388.424,94.488 ; P2.1@387.485,94.877 ccw(c388.424,95.816) 388.424,94.488 ; P2.1@387.485,94.877 ccw(c388.424,95.816) 388.424,94.488 ; R13.2@392.825,83.463 cw(c393.167,83.121) 393.167,83.604 ; R13.2@392.825,83.463 cw(c393.167,83.121) 393.167,83.604 ; R13.2@392.825,83.463 cw(c393.167,83.121) 393.167,83.604 ; R13.2@392.825,83.745 ccw(c393.167,84.087) 393.167,83.604 ; R13.2@392.825,83.745 ccw(c393.167,84.087) 393.167,83.604 ; R13.2@392.825,83.745 ccw(c393.167,84.087) 393.167,83.604 ; 392.925,94.488 ccw(c392.925,94.971) C7.1@393.267,94.629 ; 392.925,94.488 cw(c392.925,94.005) C7.1@393.267,94.347 ; 392.925,94.488 ccw(c392.925,94.971) C7.1@393.267,94.629 ; 392.925,94.488 cw(c392.925,94.005) C7.1@393.267,94.347 ; 392.925,94.488 ccw(c392.925,94.971) C7.1@393.267,94.629 ; 392.925,94.488 cw(c392.925,94.005) C7.1@393.267,94.347 ; C7.1@393.267,94.347 cw(c392.596,93.676) 393.545,93.676 ; C7.1@393.267,94.347 cw(c392.596,93.676) 393.545,93.676 ; C7.1@393.267,94.347 cw(c392.596,93.676) 393.545,93.676 ; M2.5@393.644,89.893 cw(c394.922,89.893) 394.018,90.796 ; M2.5@393.644,89.893 cw(c394.922,89.893) 394.018,90.796 ; M2.5@393.644,89.893 cw(c394.922,89.893) 394.018,90.796 ; 396.494,83.604 ccw(c396.494,86.985) L1.2@398.885,84.594 ; 396.494,83.604 ccw(c396.494,86.985) L1.2@398.885,84.594 ; 396.494,83.604 ccw(c396.494,86.985) L1.2@398.885,84.594 ; 396.837,83.604 cw(c396.837,80.708) L1.2@398.885,82.756 ; 396.837,83.604 cw(c396.837,80.708) L1.2@398.885,82.756 ; 396.837,83.604 cw(c396.837,80.708) L1.2@398.885,82.756 ; 397.46,83.604 ccw(c397.46,86.019) L1.2@399.168,84.311 ; 397.46,83.604 ccw(c397.46,86.019) L1.2@399.168,84.311 ; 397.46,83.604 ccw(c397.46,86.019) L1.2@399.168,84.311 ; 397.797,84.658 ccw(c398.374,85.235) L1.2@398.925,84.633 ; 397.797,84.658 ccw(c398.374,85.235) L1.2@398.925,84.633 ; 397.797,84.658 ccw(c398.374,85.235) L1.2@398.925,84.633 ; 397.803,83.604 cw(c397.803,81.674) L1.2@399.168,83.039 ; 397.803,83.604 cw(c397.803,81.674) L1.2@399.168,83.039 ; 397.803,83.604 cw(c397.803,81.674) L1.2@399.168,83.039 ; 398.092,84.362 ccw(c398.656,84.927) L1.2@399.196,84.338 ; 398.092,84.362 ccw(c398.656,84.927) L1.2@399.196,84.338 ; 398.092,84.362 ccw(c398.656,84.927) L1.2@399.196,84.338 ; L1.2@398.309,84.145 cw(c397.84,83.675) L1.2@398.504,83.675 ; L1.2@398.309,84.145 cw(c397.84,83.675) L1.2@398.504,83.675 ; L1.2@398.309,84.145 cw(c397.84,83.675) L1.2@398.504,83.675 ; L1.2@401.44,83.039 cw(c402.977,81.502) 402.977,83.675 ; L1.2@401.44,83.039 cw(c402.977,81.502) 402.977,83.675 ; L1.2@401.44,83.039 cw(c402.977,81.502) 402.977,83.675 ; L1.2@401.44,84.311 ccw(c402.977,85.848) 402.977,83.675 ; L1.2@401.44,84.311 ccw(c402.977,85.848) 402.977,83.675 ; L1.2@401.44,84.311 ccw(c402.977,85.848) 402.977,83.675 ; L1.2@401.723,82.756 cw(c403.942,80.537) 403.942,83.675 ; L1.2@401.723,82.756 cw(c403.942,80.537) 403.942,83.675 ; L1.2@401.723,82.756 cw(c403.942,80.537) 403.942,83.675 ; L1.2@401.723,84.594 ccw(c403.942,86.813) 403.942,83.675 ; L1.2@401.723,84.594 ccw(c403.942,86.813) 403.942,83.675 ; L1.2@401.723,84.594 ccw(c403.942,86.813) 403.942,83.675 ; C24.1@406.107,79.035 cw(c406.62,78.523) 406.62,79.248 ; C24.1@406.107,79.035 cw(c406.62,78.523) 406.62,79.248 ; C24.1@406.107,79.035 cw(c406.62,78.523) 406.62,79.248 ; C24.1@406.107,79.46 ccw(c406.62,79.972) 406.62,79.248 ; C24.1@406.107,79.46 ccw(c406.62,79.972) 406.62,79.248 ; C24.1@406.107,79.46 ccw(c406.62,79.972) 406.62,79.248 ; 407.203,79.248 ccw(c407.203,79.972) R33.1@407.715,79.46 ; 407.203,79.248 cw(c407.203,78.524) R33.1@407.715,79.036 ; 407.203,79.248 ccw(c407.203,79.972) R33.1@407.715,79.46 ; 407.203,79.248 cw(c407.203,78.524) R33.1@407.715,79.036 ; 407.203,79.248 ccw(c407.203,79.972) R33.1@407.715,79.46 ; 407.203,79.248 cw(c407.203,78.524) R33.1@407.715,79.036 ; R33.1@407.715,79.46 ccw(c407.339,79.836) 407.871,79.836 ; R33.1@407.715,79.46 ccw(c407.339,79.836) 407.871,79.836 ; R33.1@407.715,79.46 ccw(c407.339,79.836) 407.871,79.836 ; 407.871,80.108 ccw(c408.787,80.108) R33.1@408.14,79.46 ; 407.871,80.108 ccw(c408.787,80.108) R33.1@408.14,79.46 ; 407.871,80.108 ccw(c408.787,80.108) R33.1@408.14,79.46 ; 412.09,83.677 cw(c412.09,81.382) CE1.1@413.712,83.004 ; 412.09,83.677 cw(c412.09,81.382) CE1.1@413.712,83.004 ; 412.09,83.677 cw(c412.09,81.382) CE1.1@413.712,83.004 ; 413.055,83.677 cw(c413.055,82.347) CE1.1@413.995,83.287 ; 413.055,83.677 cw(c413.055,82.347) CE1.1@413.995,83.287 ; 413.055,83.677 cw(c413.055,82.347) CE1.1@413.995,83.287 ; CE1.1@414.045,83.287 cw(c414.989,82.343) 414.989,83.678 ; CE1.1@414.045,83.287 cw(c414.989,82.343) 414.989,83.678 ; CE1.1@414.045,83.287 cw(c414.989,82.343) 414.989,83.678 ; CE1.1@414.328,83.004 cw(c415.954,81.378) 415.954,83.678 ; CE1.1@414.328,83.004 cw(c415.954,81.378) 415.954,83.678 ; CE1.1@414.328,83.004 cw(c415.954,81.378) 415.954,83.678 ; 417.663,132.989 cw(c416.963,132.288) P1.1@417.937,132.107 ; 417.663,132.989 cw(c416.963,132.288) P1.1@417.937,132.107 ; 417.663,132.989 cw(c416.963,132.288) P1.1@417.937,132.107 ; C29.1@417.872,77.57 ccw(c417.573,77.869) 417.997,77.869 ; C29.1@417.872,77.57 ccw(c417.573,77.869) 417.997,77.869 ; C29.1@417.872,77.57 ccw(c417.573,77.869) 417.997,77.869 ; 417.997,77.953 ccw(c418.538,77.953) C29.1@418.155,77.57 ; 417.997,77.953 ccw(c418.538,77.953) C29.1@418.155,77.57 ; 417.997,77.953 ccw(c418.538,77.953) C29.1@418.155,77.57 ; C29.1@418.155,77.287 cw(c418.497,76.945) 418.497,77.428 ; C29.1@418.155,77.287 cw(c418.497,76.945) 418.497,77.428 ; C29.1@418.155,77.287 cw(c418.497,76.945) 418.497,77.428 ; C29.1@418.155,77.57 ccw(c418.497,77.911) 418.497,77.428 ; C29.1@418.155,77.57 ccw(c418.497,77.911) 418.497,77.428 ; C29.1@418.155,77.57 ccw(c418.497,77.911) 418.497,77.428 ; 420.071,77.428 ccw(c420.071,77.911) C30.1@420.412,77.57 ; 420.071,77.428 cw(c420.071,76.945) C30.1@420.412,77.287 ; 420.071,77.428 ccw(c420.071,77.911) C30.1@420.412,77.57 ; 420.071,77.428 cw(c420.071,76.945) C30.1@420.412,77.287 ; 420.071,77.428 ccw(c420.071,77.911) C30.1@420.412,77.57 ; 420.071,77.428 cw(c420.071,76.945) C30.1@420.412,77.287 ; C30.1@420.695,77.287 cw(c421.037,76.945) 421.037,77.428 ; C30.1@420.695,77.287 cw(c421.037,76.945) 421.037,77.428 ; C30.1@420.695,77.287 cw(c421.037,76.945) 421.037,77.428 ; C30.1@420.695,77.57 ccw(c421.037,77.911) 421.037,77.428 ; C30.1@420.695,77.57 ccw(c421.037,77.911) 421.037,77.428 ; C30.1@420.695,77.57 ccw(c421.037,77.911) 421.037,77.428 ; 422.856,77.428 ccw(c422.856,79.24) U6.3@424.137,77.959 ; 422.856,77.428 ccw(c422.856,79.24) U6.3@424.137,77.959 ; 422.856,77.428 ccw(c422.856,79.24) U6.3@424.137,77.959 ; U6.3@423.822,77.428 ccw(c423.822,78.275) U6.3@424.42,77.676 ; U6.3@423.822,77.428 ccw(c423.822,78.275) U6.3@424.42,77.676 ; U6.3@423.822,77.428 ccw(c423.822,78.275) U6.3@424.42,77.676 ; U6.3@424.137,77.393 cw(c423.454,76.71) 424.42,76.71 ; U6.3@424.137,77.393 cw(c423.454,76.71) 424.42,76.71 ; U6.3@424.137,77.393 cw(c423.454,76.71) 424.42,76.71 ; 424.42,76.71 cw(c425.386,76.71) U6.3@424.703,77.393 ; 424.42,76.71 cw(c425.386,76.71) U6.3@424.703,77.393 ; 424.42,76.71 cw(c425.386,76.71) U6.3@424.703,77.393 ; P4.1@425.585,54.983 cw(c426.429,54.139) 426.429,55.333 ; P4.1@425.585,54.983 cw(c426.429,54.139) 426.429,55.333 ; P4.1@425.585,54.983 cw(c426.429,54.139) 426.429,55.333 ; P4.1@425.585,55.761 ccw(c426.619,56.795) 426.619,55.333 ; P4.1@425.585,55.761 ccw(c426.619,56.795) 426.619,55.333 ; P4.1@425.585,55.761 ccw(c426.619,56.795) 426.619,55.333 ; R23.1@444.143,103.265 ccw(c443.54,103.868) 444.392,103.868 ; R23.1@444.143,103.265 ccw(c443.54,103.868) 444.392,103.868 ; R23.1@444.143,103.265 ccw(c443.54,103.868) 444.392,103.868 ; 444.458,78.444 ccw(c445.008,78.994) R14.2@445.008,78.216 ; 444.458,78.444 ccw(c445.008,78.994) R14.2@445.008,78.216 ; 444.458,78.444 ccw(c445.008,78.994) R14.2@445.008,78.216 ; 444.656,86.155 ccw(c445.603,86.155) C3.1@444.933,85.485 ; 444.656,86.155 ccw(c445.603,86.155) C3.1@444.933,85.485 ; 444.656,86.155 ccw(c445.603,86.155) C3.1@444.933,85.485 ; R14.2@444.667,77.675 ccw(c444.325,78.016) R14.2@444.808,78.016 ; R14.2@444.667,77.675 cw(c445.008,77.333) R14.2@445.008,77.816 ; R14.2@444.667,77.675 ccw(c444.325,78.016) R14.2@444.808,78.016 ; R14.2@444.667,77.675 cw(c445.008,77.333) R14.2@445.008,77.816 ; R14.2@444.667,77.675 ccw(c444.325,78.016) R14.2@444.808,78.016 ; R14.2@444.667,77.675 cw(c445.008,77.333) R14.2@445.008,77.816 ; C3.1@444.933,85.203 cw(c445.229,84.907) 445.229,85.325 ; C3.1@444.933,85.203 cw(c445.229,84.907) 445.229,85.325 ; C3.1@444.933,85.203 cw(c445.229,84.907) 445.229,85.325 ; C3.1@444.933,85.485 ccw(c445.321,85.873) 445.321,85.325 ; C3.1@444.933,85.485 ccw(c445.321,85.873) 445.321,85.325 ; C3.1@444.933,85.485 ccw(c445.321,85.873) 445.321,85.325 ; P3.1@450.596,96.054 ccw(c450.596,97.382) 451.535,96.443 ; P3.1@450.596,96.054 ccw(c450.596,97.382) 451.535,96.443 ; P3.1@450.596,96.054 ccw(c450.596,97.382) 451.535,96.443 ; P3.1@450.614,95.355 cw(c450.751,94.225) 451.556,95.03 ; P3.1@450.614,95.355 cw(c450.751,94.225) 451.556,95.03 ; P3.1@450.614,95.355 cw(c450.751,94.225) 451.556,95.03 ; P3.1@451.146,95.504 cw(c452.474,95.504) 451.535,96.443 ; P3.1@451.146,95.504 cw(c452.474,95.504) 451.535,96.443 ; P3.1@451.146,95.504 cw(c452.474,95.504) 451.535,96.443 ; 451.878,75.12 451.878,84.66
WIFI_RST: U1.1 U3.54 | length 61.7
  Top Layer w0.254: U1.1@394.844,114.696 396.221,114.696 ; v1@396.485,114.432 396.221,114.696 ; v1@431.759,107.065 433.003,107.065 433.616,106.453 U3.54@433.616,98.943 ; U1.1@395.613,114.437 cw(c396.22,113.853) 396.22,114.696 ; U1.1@395.613,114.437 cw(c396.22,113.853) 396.22,114.696 ; U1.1@395.613,114.437 cw(c396.22,113.853) 396.22,114.696 ; U1.1@395.613,114.955 ccw(c396.22,115.539) 396.22,114.696 ; U1.1@395.613,114.955 ccw(c396.22,115.539) 396.22,114.696 ; U1.1@395.613,114.955 ccw(c396.22,115.539) 396.22,114.696 ; 396.367,114.55 ccw(c396.574,114.756) v1@396.574,114.464 ; 396.367,114.55 ccw(c396.574,114.756) v1@396.574,114.464 ; 396.367,114.55 ccw(c396.574,114.756) v1@396.574,114.464 ; v1@431.842,107.134 ccw(c432.007,107.299) 432.007,107.065 ; v1@431.842,107.134 ccw(c432.007,107.299) 432.007,107.065 ; v1@431.842,107.134 ccw(c432.007,107.299) 432.007,107.065
  Bottom Layer w0.254: v1@396.574,114.414 396.795,114.192 396.795,107.648 397.368,107.075 v1@431.809,107.075 ; v1@396.522,114.339 cw(c395.863,113.68) 396.795,113.68 ; v1@396.522,114.339 cw(c395.863,113.68) 396.795,113.68 ; v1@396.522,114.339 cw(c395.863,113.68) 396.795,113.68 ; v1@396.702,114.519 cw(c396.476,114.293) 396.795,114.293 ; v1@396.702,114.519 cw(c396.476,114.293) 396.795,114.293 ; v1@396.702,114.519 cw(c396.476,114.293) 396.795,114.293
  other v1: 431.79,107.082 396.574,114.391
WIFI_RXD: R2.2 U3.16 | length 36.3
  Top Layer w0.254: R2.2@417.479,112.595 418.076,112.595 ; v1@425.167,102.981 425.167,107.462 424.348,108.282 419.087,108.282 418.493,108.877 418.493,112.177 418.076,112.595 ; v1@425.515,89.493 U3.16@426.666,89.493 ; R2.2@417.685,112.416 cw(c418.075,112.079) 418.075,112.595 ; R2.2@417.685,112.416 cw(c418.075,112.079) 418.075,112.595 ; R2.2@417.685,112.416 cw(c418.075,112.079) 418.075,112.595 ; R2.2@417.685,112.773 ccw(c418.075,113.11) 418.075,112.595 ; R2.2@417.685,112.773 ccw(c418.075,113.11) 418.075,112.595 ; R2.2@417.685,112.773 ccw(c418.075,113.11) 418.075,112.595 ; v1@425.081,103.017 ccw(c424.872,103.226) 425.167,103.226 ; v1@425.081,103.017 ccw(c424.872,103.226) 425.167,103.226 ; v1@425.081,103.017 ccw(c424.872,103.226) 425.167,103.226 ; v1@425.552,89.404 cw(c425.765,89.191) 425.765,89.493 ; v1@425.552,89.404 cw(c425.765,89.191) 425.765,89.493 ; v1@425.552,89.404 cw(c425.765,89.191) 425.765,89.493
  Bottom Layer w0.254: v1@425.164,102.95 425.164,89.774 v1@425.5,89.438 ; v1@425.081,102.914 cw(c424.881,102.714) 425.164,102.714 ; v1@425.081,102.914 cw(c424.881,102.714) 425.164,102.714 ; v1@425.081,102.914 cw(c424.881,102.714) 425.164,102.714 ; 425.345,89.593 ccw(c425.5,89.749) v1@425.5,89.529 ; 425.345,89.593 ccw(c425.5,89.749) v1@425.5,89.529 ; 425.345,89.593 ccw(c425.5,89.749) v1@425.5,89.529
  other v1: 425.5,89.456 425.132,102.966
WIFI_TXD: R1.2 U3.17 | length 42.8
  Top Layer w0.254: R1.2@417.479,114.627 418.414,114.627 418.847,114.194 418.847,109.278 419.427,108.698 424.62,108.698 425.693,107.625 v1@425.693,103.662 ; v1@426.995,86.454 428.181,86.454 428.616,86.89 U3.17@428.616,87.543 ; R1.2@417.672,114.434 cw(c418.138,113.968) 418.138,114.627 ; R1.2@417.672,114.434 cw(c418.138,113.968) 418.138,114.627 ; R1.2@417.672,114.434 cw(c418.138,113.968) 418.138,114.627 ; R1.2@417.672,114.82 ccw(c418.138,115.286) 418.138,114.627 ; R1.2@417.672,114.82 ccw(c418.138,115.286) 418.138,114.627 ; R1.2@417.672,114.82 ccw(c418.138,115.286) 418.138,114.627 ; 425.693,103.898 ccw(c425.954,103.898) v1@425.769,103.713 ; 425.693,103.898 ccw(c425.954,103.898) v1@425.769,103.713 ; 425.693,103.898 ccw(c425.954,103.898) v1@425.769,103.713 ; 428.539,86.813 ccw(c428.409,86.943) U3.17@428.593,86.943 ; 428.539,86.813 ccw(c428.409,86.943) U3.17@428.593,86.943 ; 428.539,86.813 ccw(c428.409,86.943) U3.17@428.593,86.943
  Bottom Layer w0.254: v1@425.721,103.63 425.721,90.073 426.017,89.777 426.017,86.939 426.488,86.468 v1@426.741,86.468 ; 426.72,86.468 cw(c426.72,86.246) v1@426.876,86.403 ; 426.72,86.468 cw(c426.72,86.246) v1@426.876,86.403 ; 426.72,86.468 cw(c426.72,86.246) v1@426.876,86.403
  other v1: 426.928,86.454 425.718,103.662
pads on no net: J2.1 J2.23 J2.24 K1.1 K1.2 K1.3 K1.6 U1.2 U1.4 U1.5 U1.6 U1.7 U1.11 U1.13 U1.14 U2.7 U3.33 U3.34 U3.43 U3.45 U3.51 U3.65 U3.66 U5.6 U5.14 Y2.1
copper on no net:
  other v2: 388.797,58.84 447.876,58.84 389.759,128.727 449.306,129.314

## Polygon pours and split planes (outlines as drawn)
no net on Keep-Out Layer (none, shelved): 384.839,56.947 384.442,131.312 cw(c384.474,131.435) 384.349,131.458 cw(c388.115,130.784) 384.439,131.845 384.439,131.909 cw(c384.566,131.91) 384.492,132.014 cw(c388.115,130.784) 387.365,134.536 cw(c387.39,134.411) 387.443,134.526 cw(c387.481,134.405) 387.481,134.532 449.674,134.532 cw(c449.73,134.418) 449.752,134.543 cw(c449.079,130.777) 449.811,134.532 449.988,134.532 cw(c449.988,134.405) 450.101,134.464 cw(c449.079,130.777) 452.61,132.249 cw(c452.684,132.145) 452.811,132.145 452.811,131.618 cw(c449.079,130.777) 452.83,131.527 cw(c452.705,131.502) 452.833,131.502 cw(c452.705,131.502) 452.811,131.431 452.829,56.994 cw(c452.772,56.88) 452.899,56.88 cw(c452.772,56.88) 452.897,56.858 cw(c449.131,57.531) 452.829,56.551 452.829,56.448 cw(c452.702,56.448) 452.766,56.338 cw(c449.131,57.531) 450.348,53.904 cw(c450.318,53.78) 450.446,53.78 cw(c450.318,53.78) 450.318,53.653 388.003,53.653 cw(c388.003,53.78) 387.875,53.786 cw(c387.828,53.905) 387.805,53.779 cw(c388.479,57.545) 384.727,56.795 cw(c384.852,56.82)
no net on Keep-Out Layer (none, shelved): 384.839,56.947 384.442,131.312 cw(c384.474,131.435) 384.349,131.458 cw(c388.115,130.784) 384.439,131.845 384.439,131.909 cw(c384.566,131.91) 384.492,132.014 cw(c388.115,130.784) 387.365,134.536 cw(c387.39,134.411) 387.443,134.526 cw(c387.481,134.405) 387.481,134.532 449.674,134.532 cw(c449.73,134.418) 449.752,134.543 cw(c449.079,130.777) 449.811,134.532 449.988,134.532 cw(c449.988,134.405) 450.101,134.464 cw(c449.079,130.777) 452.61,132.249 cw(c452.684,132.145) 452.811,132.145 452.811,131.618 cw(c449.079,130.777) 452.83,131.527 cw(c452.705,131.502) 452.833,131.502 cw(c452.705,131.502) 452.811,131.431 452.829,56.994 cw(c452.772,56.88) 452.899,56.88 cw(c452.772,56.88) 452.897,56.858 cw(c449.131,57.531) 452.829,56.551 452.829,56.448 cw(c452.702,56.448) 452.766,56.338 cw(c449.131,57.531) 450.348,53.904 cw(c450.318,53.78) 450.446,53.78 cw(c450.318,53.78) 450.318,53.653 388.003,53.653 cw(c388.003,53.78) 387.875,53.786 cw(c387.828,53.905) 387.805,53.779 cw(c388.479,57.545) 384.727,56.795 cw(c384.852,56.82)
GND on Bottom Layer "Bottom Layer-No Net" (solid, remove dead copper): 386.418,135.618 452.262,135.618 453.398,134.482 453.398,53.444 383.362,53.444 383.187,53.269 382.925,53.531 382.925,133.871 384.585,133.871 386.331,135.618
GND on Top Layer "Bottom Layer-No Net" (solid, remove dead copper): 385.579,135.25 452.435,135.25 452.916,134.77 453.78,133.905 453.78,54.657 451.667,52.544 451.571,52.64 385.002,52.64 385.002,53.985 382.505,56.482 382.793,56.771 382.793,135.154 385.098,135.154 385.387,135.442

## Keep-outs
Keep-Out Layer:
  circle w0.254: c389.767,128.727 r2.54
  circle w0.254: c388.936,58.786 r2.54
  circle w0.254: c447.823,58.786 r2.54
  circle w0.254: c449.293,129.314 r2.54
  lines w0.254: 384.474,131.435 cw(c388.115,130.784) 387.39,134.411 ; 384.566,131.91 384.968,56.58 ; 384.852,56.82 ccw(c388.479,57.545) 387.828,53.905 ; 387.481,134.405 449.988,134.405 ; 388.003,53.78 450.318,53.78 ; 449.73,134.418 cw(c449.079,130.777) 452.705,131.502 ; 449.857,53.905 ccw(c449.131,57.531) 452.772,56.88 ; 452.684,132.145 452.702,56.448

## Silkscreen, mask and mechanical layers (free items; w line width, h text height)
Mechanical 1:
  lines w0.254: 381.023,134.823 387.119,134.823 ; 381.029,53.953 388.449,53.953 ; 381.154,55.568 381.661,54.044 ; 381.198,132.811 381.706,134.335 ; 381.407,54.044 381.915,54.044 ; 381.452,134.335 381.96,134.335 ; 381.678,84.642 381.661,54.044 ; 381.689,103.737 381.706,134.335 ; 382.17,55.568 381.661,54.044 ; 382.214,132.811 381.706,134.335 ; 387.247,136.053 387.247,136.561 ; 388.771,135.799 387.247,136.307 ; 388.771,136.815 387.247,136.307 ; 414.643,136.307 387.247,136.307 ; 424.851,136.307 452.247,136.307 ; 450.723,135.799 452.247,136.307 ; 450.723,136.815 452.247,136.307 ; 452.247,136.053 452.247,136.561 ; 452.523,132.994 452.523,135.94
  text "65 (mm)" at 414.897,135.393 h1.52
  text "80.29098 (mm)" at 382.593,84.895 h1.52 r89.97

## Text inside footprints (layer, text, board x,y; h text height)
C1: Top Overlay "C" at 388.362,110.594 h0.4 r90
C2: Top Overlay "C" at 399.489,88.417 h0.4
C3: Top Overlay "C" at 443.742,85.494 h0.4 r270
C4: Top Overlay "C" at 401.821,88.917 h0.4 r180
C5: Top Overlay "C" at 403.853,88.917 h0.4 r180
C6: Top Overlay "C" at 448.206,88.642 h0.4 r180
C7: Top Overlay "C" at 394.458,94.338 h0.4 r90
C8: Top Overlay "C" at 389.486,88.65 h0.4
C9: Top Overlay "C" at 436.014,84.449 h0.4 r180
C10: Top Overlay "C" at 416.31,104.29 h0.4 r270